# Altium PCB Nano.PcbDoc
Units mm, origin at the board's own origin, x right, y up, seen from the top; angles counter-clockwise.
Board outline 44 x 18.01 mm, 4 copper layers (Top Layer, GND, POWER, Bottom Layer), stack 0.746 mm thick; 37 components, 43 nets, 179 pads, 69 vias.
Unrouted connection lines stored in the file: 6.
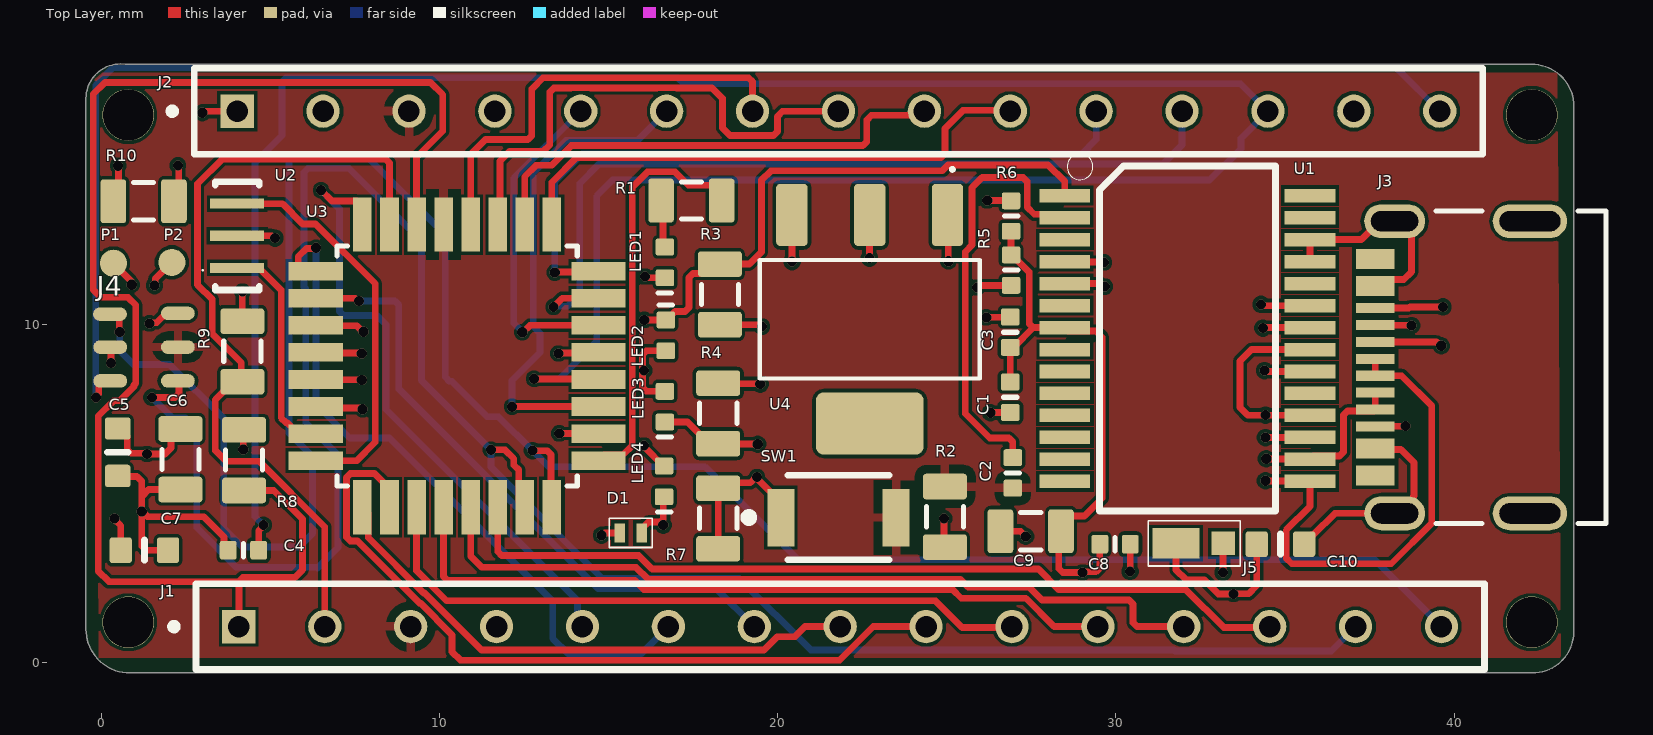
[diagram p0: Top Layer view]
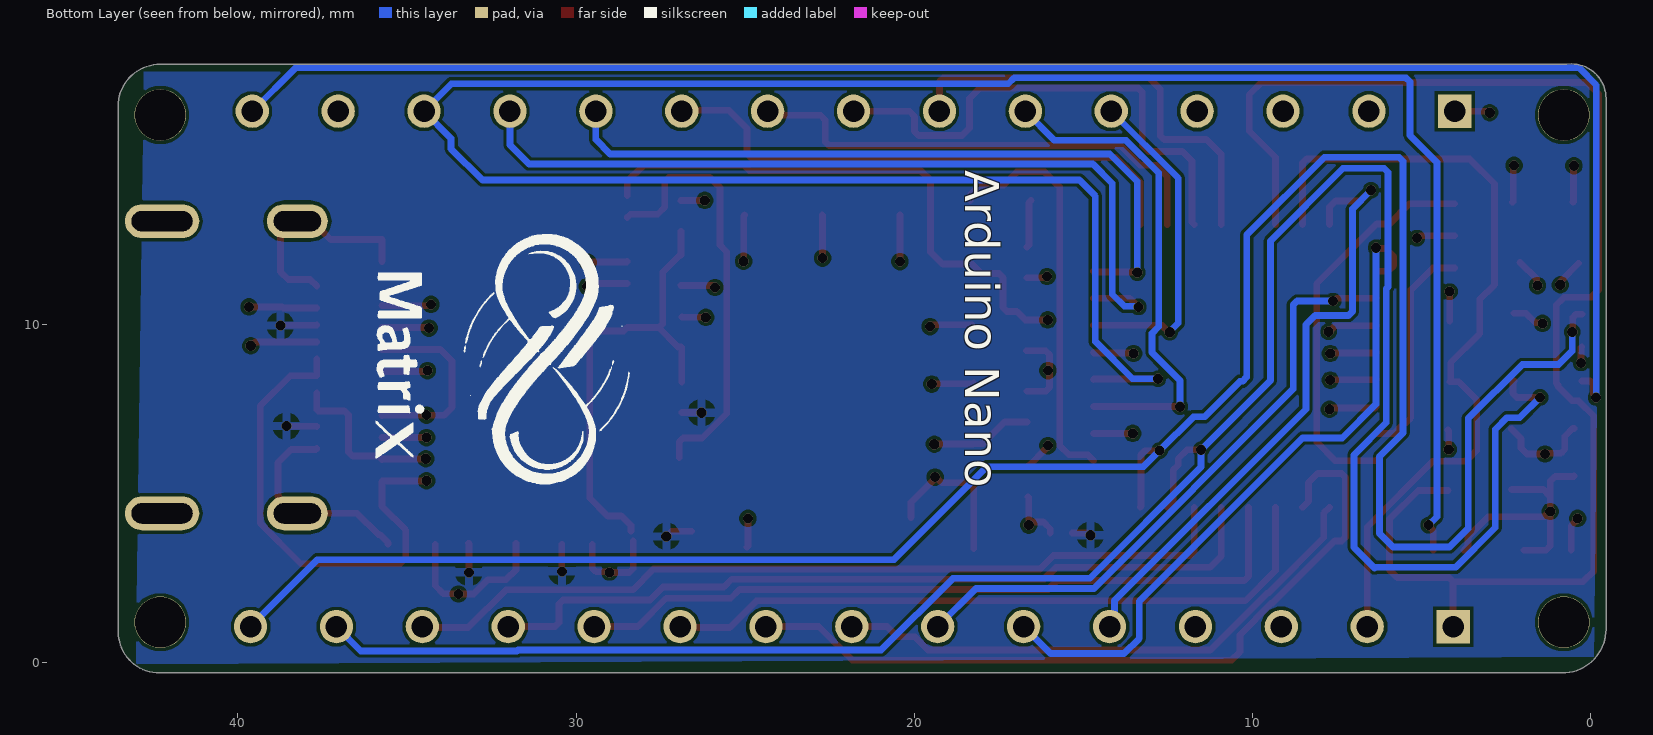
[diagram p1: Bottom Layer view, seen from below]
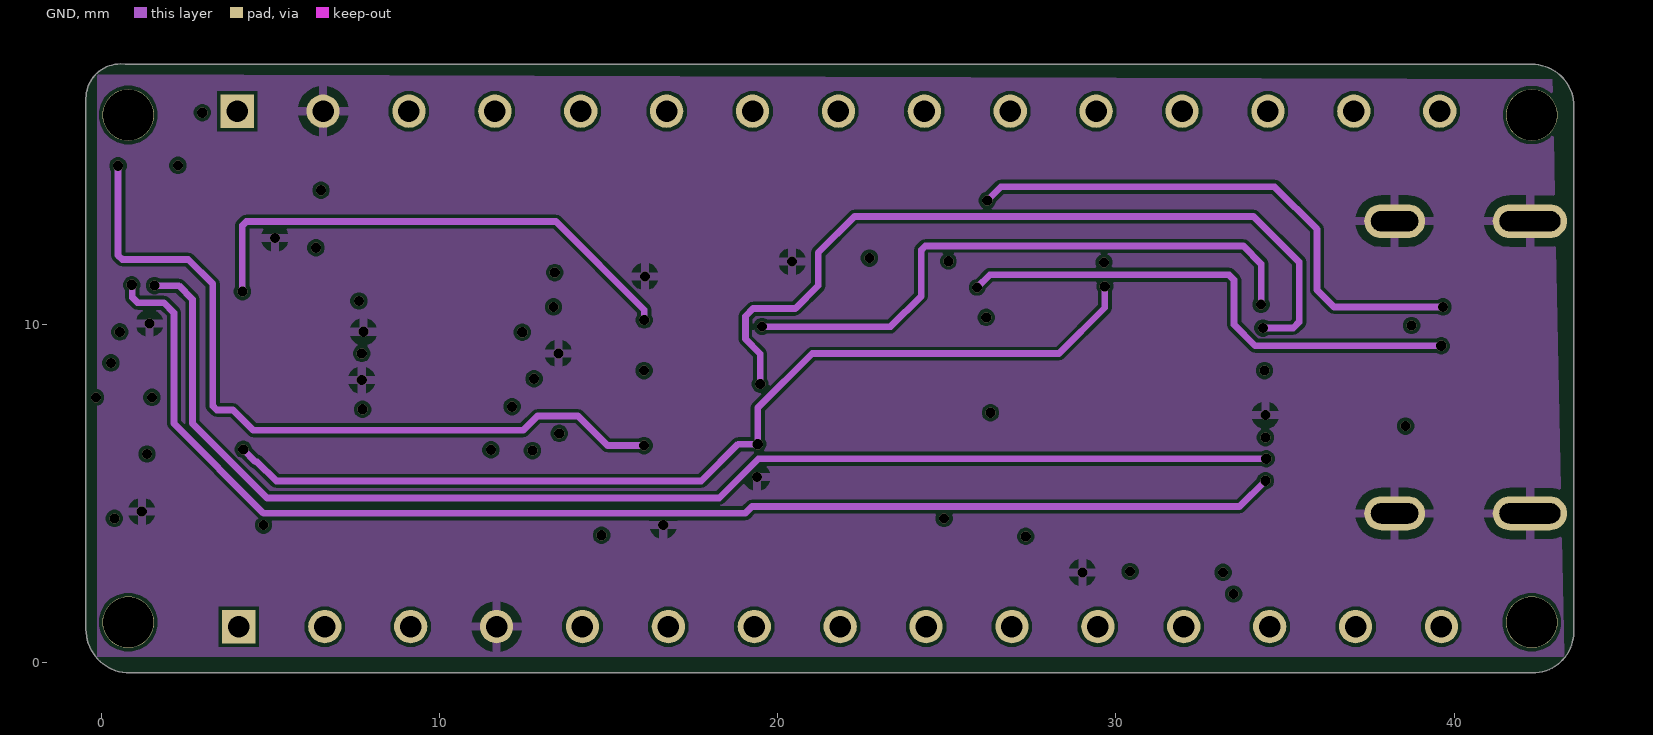
[diagram p2: GND]
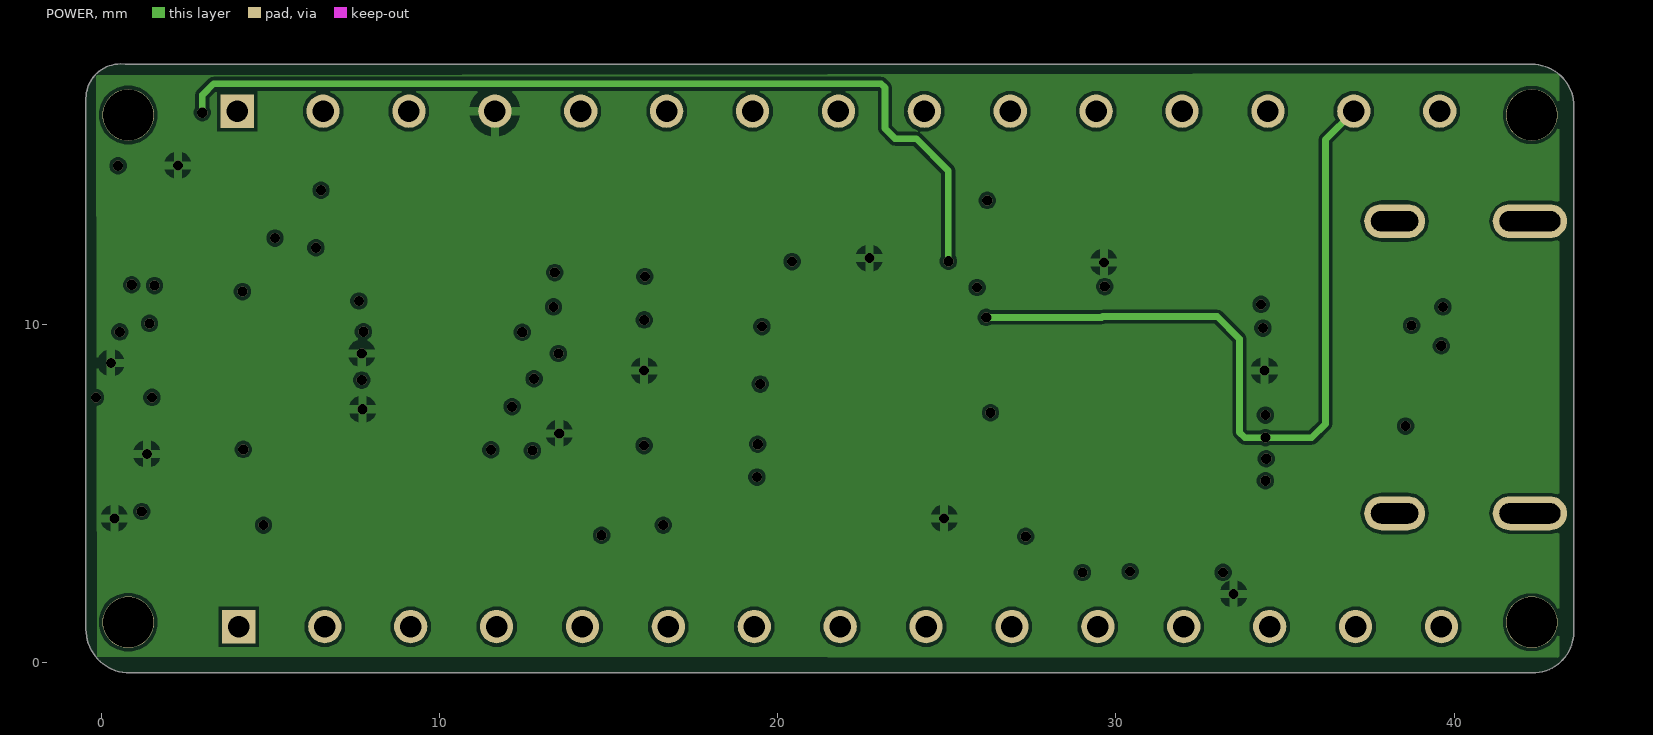
[diagram p3: POWER]
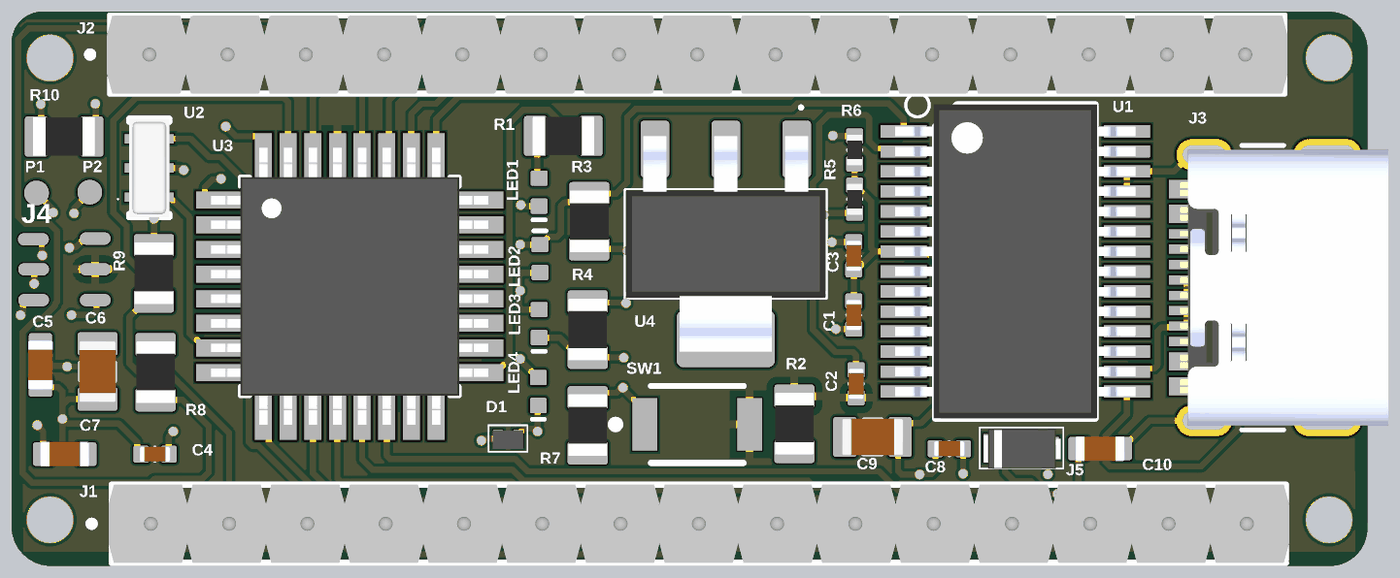
[diagram p4: 3D render of the assembled board from above, using the file's embedded part models]

## Layer stack, top to bottom
Top Solder: solder mask 0.0102, Solder Resist, Dk 3.5
Top Layer: signal copper 0.035
Dielectric 2: prepreg 0.0711, PP-006, Dk 4.1
Dielectric 4: prepreg 0.0711, PP-006, Dk 4.1
GND: signal copper 0.0356
Dielectric 1: dielectric 0.32, FR-4, Dk 4.8
POWER: signal copper 0.0356
Dielectric 5: prepreg 0.0711, PP-006, Dk 4.1
Dielectric 3: prepreg 0.0711, PP-006, Dk 4.1
Bottom Layer: signal copper 0.035
Bottom Solder: solder mask 0.0102, Solder Resist, Dk 3.5

## Board outline
43.543,16.452 ccw(c42.295,16.448) 42.291,17.695 0.711,17.695 0.559,17.704 ccw(c0.559,16.688) -0.457,16.688 -0.457,0.991 ccw(c0.838,0.991) 0.838,-0.305 42.316,-0.305 ccw(c42.316,0.914) 43.536,0.914 43.543,1.575

## Design rules (kind name [scope] priority, off if disabled: settings)
Clearance [All] p1: gap=0.1 ignorepadtopadclearanceinfootprint=FALSE
MinimumSolderMaskSliver [All] p1: minsoldermaskwidth=0.05
PolygonConnect [All] p1: connectstyle=Relief reliefconductorwidth=0.254 reliefentries=4 polygonreliefangle="90 Angle" airgapwidth=0.254
RoutingVias [All] p1: holewidth=0.5 width=0.1 viastyle="Through Hole" minholewidth=0.5 minwidth=0.1 maxholewidth=0.5 maxwidth=0.2
SMDNeckDown [All] p1: percent=75.000
SilkToSilkClearance [All] p1: silktosilkclearance=0.05
SilkToSolderMaskClearance [IsPad] p1: minsilkscreentomaskgap=0.05 clearancetoexposedcopper=TRUE
SolderMaskExpansion [All] p1: expansion=0.05 istentingtop=FALSE
SupplyNets "Schematic Supply Nets_4" [InNet('3V3')] p1: voltage=0.000
SupplyNets "Schematic Supply Nets_3" [InNet('+5v')] p2: voltage=0.000
SupplyNets "Schematic Supply Nets_2" [InNet('VUSB')] p3: voltage=0.000
SupplyNets "Schematic Supply Nets_1" [InNet('VIN')] p4: voltage=0.000
SupplyNets "Schematic Supply Nets" [InNet('GND')] p5: voltage=0.000
Width [All] p1: maxlimit=0.3 minlimit=0.05 preferedwidth=0.2
27 further rules are at their usual default settings.

## Components (designator, comment, footprint, x,y, rotation, side; value= is the part's Value field where it differs from the comment)
C1 "Capacitor 100nF +/-20% 50V 0402" CAPC0402(1005)60_L 26.873,7.849 r90 top value=100nF
C2 "Capacitor 100nF +/-20% 50V 0402" CAPC0402(1005)60_L 26.949,5.613 r90 top value=100nF
C3 "Capacitor 100nF +/-20% 50V 0402" CAPC0402(1005)60_L 26.873,9.772 r270 top value=100nF
C4 "Capacitor 100nF +/-20% 50V 0402" CAPC0402(1005)60_L 4.198,3.327 r180 top value=100nF
C5 "Capacitor 1µF +/-40% 50V 0603" CAPC0603(1608)100_L 0.483,6.223 r270 top value=1µF
C6 "Capacitor 4.7µF +/-40% 25V 0805" CAPC0805(2012)145_L 2.337,6.009 r270 top value=4.7µF
C7 "Capacitor 1µF +/-40% 50V 0603" CAPC0603(1608)100_L 1.27,3.327 r0 top value=1µF
C8 "Capacitor 100nF +/-20% 50V 0402" CAPC0402(1005)60_L 29.972,3.505 r180 top value=100nF
C9 "Capacitor 4.7µF +/-40% 25V 0805" CAPC0805(2012)145_L 27.483,3.886 r0 top value=4.7µF
C10 "Capacitor 1µF +/-40% 50V 0603" CAPC0603(1608)100_L 34.863,3.505 r0 top value=1µF
D1 "AQ3045-01ETG" AQ3045-01ETG 14.813,3.175 r0 top
J1 "HEADER" HEADER 2.286,-0.711 r0 top
J2 "HEADER" HEADER 2.235,14.529 r0 top
J3 "217179-0001" 2171790001 44.9,3.275 r90 top
J4 "ICSP" ICSP -0.324,7.944 r0 top
J5 "SS1P3L" SS1P3L 32.175,2.531 r0 top
LED1 "QBLP595-Y" QTB-QBLP595_V 16.662,11.836 r90 top
LED2 "QBLP595-R" QTB-QBLP595_V 16.688,9.68 r270 top
LED3 "QBLP595-IG" QTB-QBLP595_V 16.662,7.569 r90 top
LED4 "QBLP595-IG" QTB-QBLP595_V 16.637,5.362 r90 top
P1 "D-" "TEST POINT" -0.127,11.303 r0 top
P2 "D+" "TEST POINT" 1.6,11.328 r0 top
R1 "1KR5J" RESC0805(2012)_L 17.45,13.665 r0 top value=1k
R2 "1KR5J" RESC0805(2012)_L 24.943,4.317 r90 top value=1k
R3 "1KR5J" RESC0805(2012)_L 18.288,10.886 r270 top value=1k
R4 "1KR5J" RESC0805(2012)_L 18.237,7.377 r90 top value=1k
R5 "Resistor 5K6  +/-5 % 0402 63 mW" RESC0402(1005)_L 26.899,11.608 r90 top value=5.6k
R6 "Resistor 5K6  +/-5 % 0402 63 mW" RESC0402(1005)_L 26.899,13.208 r270 top value=5.6k
R7 "1KR5J" RESC0805(2012)_L 18.237,4.267 r90 top value=1k
R8 "1KR5J" RESC0805(2012)_L 4.216,5.994 r90 top value=1k
R9 "1KR5J" RESC0805(2012)_L 4.166,9.206 r90 top value=1k
R10 "1KR5J" RESC0805(2012)_L 1.243,13.645 r180 top value=1k
SW1 "B3U-1000P" OMRON-B3U-1000_V 21.791,4.293 r0 top
U1 "FT232-RL" FT232-RL 28.049,3.998 r270 top
U2 "CSTCE16M0V53-R0" MURA-CSTCE_V-3_V 4.013,12.624 r90 top
U3 "ATMEGA-328P" ATMEGA-328P 5.268,3.525 r0 top
U4 "LM1117IMPX-5.0" LM1117IMPX-5.0 19.218,14.41 r270 top

## Footprints (in the part's own frame and the unit in brackets; to place one, negate y for a bottom-side part, rotate by r counter-clockwise, add the part's x,y. Pads: shape width x height; smd on the part's side, far side on the other; paste and mask are expansions set on the pad)
2171790001 [mm]
  rect 0.298x1.15 smd mask+0.064: 1(3.711,7.235) 2(6.711,7.235) 3(4.211,7.235) 4(4.711,7.235) 5(5.211,7.235) 6(5.711,7.235) 7(6.211,7.235) 8(7.211,7.235)
  oval 1x1.8 hole 0.6 slot 1.4 at 90 deg mask+0.064: 9(9.781,6.66) 10(1.141,6.66)
  oval 1x2.2 hole 0.6 slot 1.8 at 90 deg mask+0.064: 11(9.781,2.66) 12(1.141,2.66)
  rect 0.59x1.15 smd mask+0.064: 13(3.061,7.235) 14(7.861,7.235) A1B12(2.261,7.235) B1A12(8.661,7.235)
  silkscreen extent 0.84,0.41 10.08,5.44, body extent 0.99,0.69 9.93,7.44, height 3.24
AQ3045-01ETG [mm]
  rect 0.3x0.55 smd mask+0.051: 0(0.513,0.66) 1(1.163,0.66)
  silkscreen extent 0.2,0.23 1.47,1.09, body extent 0.34,0.31 1.34,0.91, height 0.55
ATMEGA-328P [mm]
  rect 1.6x0.55 smd paste+0 mask+0.076: 1(1.07,8.05) 2(1.07,7.25) 3(1.07,6.45) 4(1.07,5.65) 5(1.07,4.85) 6(1.07,4.05) 7(1.07,3.25) 8(1.07,2.45) 17(9.43,2.45) 18(9.43,3.25) 19(9.43,4.05) 20(9.43,4.85) 21(9.43,5.65) 22(9.43,6.45) 23(9.43,7.25) 24(9.43,8.05)
  rect 0.55x1.6 smd paste+0 mask+0.076: 9(2.45,1.07) 10(3.25,1.07) 11(4.05,1.07) 12(4.85,1.07) 13(5.65,1.07) 14(6.45,1.07) 15(7.25,1.07) 16(8.05,1.07) 25(8.05,9.43) 26(7.25,9.43) 27(6.45,9.43) 28(5.65,9.43) 29(4.85,9.43) 30(4.05,9.43) 31(3.25,9.43) 32(2.45,9.43)
  silkscreen extent 1.7,1.7 8.8,8.8, body extent 0.75,0.75 9.75,9.75, height 1.2
CAPC0402(1005)60_L [mm] "Chip Capacitor, Body 1.0x0.5mm, Height 0.6mm, IPC High Density"
  rrect25% 0.5x0.55 smd: 1(-0.45,0) 2(0.45,0)
  silkscreen extent 0,-0.2 0,0.2, body extent -0.5,-0.25 0.5,0.25, height 0.6
CAPC0603(1608)100_L [mm] "Chip Capacitor, Body 1.6x0.8mm, Height 1.0mm, IPC High Density"
  rrect25% 0.66x0.76 smd: 1(-0.7,0) 2(0.7,0)
  silkscreen extent 0,-0.3 0,0.3, body extent -0.8,-0.4 0.8,0.4, height 0.95
CAPC0805(2012)145_L [mm] "Chip Capacitor, Body 2.0x1.2mm, Height 1.45mm, IPC High Density"
  rrect25% 0.76x1.3 smd: 1(-0.9,0) 2(0.89,0)
  silkscreen extent -0.3,-0.55 0.3,0.55, body extent -1,-0.6 1,0.6, height 1.45
FT232-RL [mm]
  rect 0.4x1.5 smd paste+0 mask+0.076: 1(-9.813,0.439) 2(-9.163,0.439) 3(-8.513,0.439) 4(-7.863,0.439) 5(-7.213,0.439) 6(-6.563,0.439) 7(-5.913,0.439) 8(-5.263,0.439) 9(-4.613,0.439) 10(-3.963,0.439) 11(-3.313,0.439) 12(-2.663,0.439) 13(-2.013,0.439) 14(-1.363,0.439) 15(-1.363,7.689) 16(-2.013,7.689) 17(-2.663,7.689) 18(-3.313,7.689) 19(-3.963,7.689) 20(-4.613,7.689) 21(-5.263,7.689) 22(-5.913,7.689) 23(-6.563,7.689) 24(-7.213,7.689) 25(-7.863,7.689) 26(-8.513,7.689) 27(-9.163,7.689) 28(-9.813,7.689)
  silkscreen extent -11.05,0.51 -0.49,6.66, body extent -10.69,0.16 -0.49,7.96, height 2
HEADER [mm]
  rect 0.985x0.985 hole 0.635: 1(1.778,1.778)
  round 0.985 hole 0.635: 2(4.318,1.778) 3(6.858,1.778) 4(9.398,1.778) 5(11.938,1.778) 6(14.478,1.778) 7(17.018,1.778) 8(19.558,1.778) 9(22.098,1.778) 10(24.638,1.778) 11(27.178,1.778) 12(29.718,1.778) 13(32.258,1.778) 14(34.798,1.778) 15(37.338,1.778)
  silkscreen extent -0.24,0.51 38.61,3.05, body extent 0.41,0.51 38.71,3.05, height 8.28
ICSP [mm]
  oval 1x0.4 smd: 1(0.578,2.362) 2(0.584,1.388) 3(0.584,0.388) 4(2.584,0.388) 5(2.584,1.388) 6(2.584,2.388)
LM1117IMPX-5.0 [mm]
  rrect25% 1.84x0.93 smd: 1(1.17,5.8) 2(1.17,3.5) 3(1.17,1.2)
  rrect25% 1.84x3.19 smd: 4(7.34,3.5)
  silkscreen extent -0.23,0.25 6,6.75, body extent 0.76,0.25 7.75,6.75, height 1.8
MURA-CSTCE_V-3_V [mm] "SMD, 3-Leads, Body 3.2x1.3mm, Pitch 0.95mm"
  rect 0.3x1.6 smd: 1(-0.95,0) 2(0,0) 3(0.95,0)
  silkscreen extent -1.6,-0.65 1.6,1.03, body extent -1.6,-0.65 1.6,0.65, height 1.02
OMRON-B3U-1000_V [mm] "SMD, 2-Leads, Body 3x2.5mm"
  rect 0.8x1.7 smd: 1(-1.7,0) 2(1.7,0)
  silkscreen extent -2.77,-1.25 1.5,1.25, body extent -1.5,-1.25 1.5,1.25, height 1.75
QTB-QBLP595_V [mm] "SMD, 2-Leads, Body 1x0.5mm"
  rrect25% 0.5x0.55 smd: 1(-0.455,0) 2(0.455,0)
  silkscreen extent -0.9,-0.2 -0.9,0.2, body extent -0.5,-0.25 0.5,0.25, height 0.5
RESC0402(1005)_L [mm] "Chip Resistor, Body 1.0x0.5mm, IPC High Density"
  rrect25% 0.5x0.55 smd: 1(-0.45,0) 2(0.45,0)
  silkscreen extent 0,-0.2 0,0.2, body extent -0.5,-0.25 0.5,0.25, height 0.3
RESC0805(2012)_L [mm] "Chip Resistor, Body 2.0x1.3mm, IPC High Density"
  rrect25% 0.76x1.3 smd: 1(-0.9,0) 2(0.89,0)
  silkscreen extent -0.3,-0.55 0.3,0.55, body extent -1,-0.62 1,0.63, height 0.6
SS1P3L [mm]
  rect 0.7x0.7 smd mask+0.05: A(1,1)
  rect 1.4x0.9 smd paste+0 mask+0.05: K(-0.4,1)
  silkscreen extent -1.22,0.33 1.5,1.66, body extent -1.1,0.32 1.4,1.62, height 0.73
"TEST POINT" [mm]
  round 0.8 smd: 1(0.483,0.508)

## Part data
C1 C2 C3 C4 C8: library part CMP-001-00067-3, "Chip Capacitor, 100nF +/-20%, 50V, 0402, Thickness 0.6 mm", Case/Package=0402, Max Operating Temperature=85°C, Min Operating Temperature=-55°C, Tolerance=10%, Voltage Rating=50V, Mounting Technology=SMT, Pins=2
C5 C7 C10: library part CMP-001-00078-4, "Chip Capacitor, 1µF +/-40%, 50V, 0603, Thickness 1 mm", Case/Package=0603, Max Operating Temperature=85°C, Min Operating Temperature=-55°C, Tolerance=10%, Voltage Rating=50V, Mounting Technology=SMT, Pins=2
C6 C9: library part CMP-001-00080-4, "Chip Capacitor, 4.7µF +/-40%, 25V, 0805, Thickness 1.45 mm", Case/Package=0805, Max Operating Temperature=85°C, Min Operating Temperature=-55°C, Tolerance=20%, Voltage Rating=25V, Mounting Technology=SMT, Pins=2
D1: "Bi 30Kv 5V 0.35Pf Automotve Tvs Sod882/ T&r Rohs Compliant: Yes"
J1 J2: "Header Pins placements"
J3: library part "USB - C", "USB Connector, USB Type C, USB 2.0, Receptacle, 16 Ways, Surface Mount, Through Hole Mount"
J5: "Diode Schottky 30 V 1.5A Surface Mount DO-220AA (SMP)", Package="MicroSMP Vishay General Semiconductor - Diodes Division", Check_prices=https://www.snapeda.com/parts/SS1P3L/Vishay/view-part/?ref=eda, MF="Vishay Semiconductor", MP=SS1P3L, SnapEDA_Link=https://www.snapeda.com/parts/SS1P3L/Vishay/view-part/?ref=snap
LED1: library part CMP-007-00043-3, "Chip LED 0402, Yellow, 0.02 A, 3.1 to 3.7 V, -40 to 80 degC, 2-Pin SMD, RoHS, Tape and Reel", Case/Package=0402, Colour=Yellow, Mounting Technology=SMT, Pins=2, RoHS Compliant=Yes
LED2: library part CMP-007-00040-3, "Chip LED 0402, Red, 0.02 A, 2.0 to 2.5 V, -40 to 80 degC, 2-Pin SMD, RoHS, Tape and Reel", Case/Package=0402, Colour=Red, Mounting Technology=SMT, Pins=2, RoHS Compliant=Yes
LED3 LED4: library part CMP-007-00041-3, "Chip LED 0402, Green, 0.02 A, 3.1 to 3.7 V, -40 to 80 degC, 2-Pin SMD, RoHS, Tape and Reel", Case/Package=0402, Colour=Green, Mounting Technology=SMT, Pins=2, RoHS Compliant=Yes
P1 P2: library part "TEST POINT"
R1 R2 R3 R4 R7 R8 R9 R10: library part CMP-009-00076-2, "1K 0.125W 5% 0805 (2012 Metric)  SMD", Case/Package=0805, Power=125mW, Tolerance=5%, Mounting Technology=SMT, Pins=2
R5 R6: library part CMP-009-00136-3, "Chip Resistor, 5,6 kOhms, +/-5 %, 63 mW, -55 to 155 degC, 0402", Case/Package=0402, Max Operating Temperature=155°C, Min Operating Temperature=-55°C, Power=63mW, Tolerance=5%, Pins=2
SW1: library part CMP-011-00000-2, "Tactile Switch, SPST-NO, 0.05 A, 12 V, -25 to 70 degC, 2-Pin SMD, RoHS, Tape and Reel", Case/Package=B3U-1000, Contact Current Rating=50mA, IP Rating=IP40, Manufacturer="Omron Electronic Components", Max Contact Resistance=100mohm, Max Operating Temperature=70°C, Max Voltage Rating (DC)=12V, Min Operating Temperature=-25°C, Operating Force=153gf, Package Description="2-Pin Surface Mount Device, Body 3 x 2.5 mm", Package Quantity=3500, Resistance=0.1Ohm, Contact Material=Silver, Current Rating=50mA, Datasheet URL=http://www.omron.com/ecb/products/pdf/en-b3u.pdf, Datasheet Version=Jan-15, Manufacturer URL=http://www.omron.com/, Max Current Rating=50mA, Mounting Technology=SM, Package Reference=B3U-1000, Packaging=TapeandReel, RoHS Compliant=True, Throw Configuration=SPST, Voltage Rating=12V, Voltage Rating (DC)=12V
U1: "USB Bridge, USB to UART USB 2.0 UART Interface 28-SSOP"
U2: library part CMP-003-00023-3, "Ceramic Resonator, 16 MHz, +/- 0.5%, 15 pF, -20 to 80 degC, 3-Pin SMD, RoHS, Tape and Reel", Case/Package=CSMD, Frequency=16MHz, Frequency Tolerance=0.5%, Load Capacitance=15pF, Manufacturer=Murata, Max Operating Temperature=80°C, Min Operating Temperature=-20°C, Package Quantity=3000, Package Reference=CSTCE_V-3, Datasheet URL=http://www.murata.com/products/catalog/pdf/p16e.pdf, Datasheet Version="Rev. P16E, 12/2015", Impedance=40Ohm, Manufacturer URL=http://www.murata.com/, Packaging=TapeandReel, Pins=3, RoHS Compliant=True, Self Resonant Frequency=16MHz, Tolerance=0.5%
U3: "AVR AVR® ATmega, Functional Safety (FuSa) Microcontroller IC 8-Bit 20MHz 32KB (16K x 16) FLASH 32-TQFP (7x7)"
U4: library part LM111IMPX-5.0, "Linear Voltage Regulator IC Positive Fixed 1 Output 800mA SOT-223-4"

## Free pads (board coordinates)
  round 1.524 hole 1.5 paste+0 mask+0: 1(0.793,16.195) 2(42.293,16.195) 3(42.293,1.195) 4(0.793,1.195)

## Via types
v1: diameter 0.3, hole 0.3, Top Layer to Bottom Layer, tented top, 68 vias
v2: diameter 0.3, hole 0.3, Top Layer to Bottom Layer, tented both sides, 1 vias

## Nets (pads, with @x,y where several pads share a name; then routed paths per layer and width w, separated by ;. In a path a pad name is that pad's centre, name@x,y a point inside that pad or via, vN(x,y) a via of type N, cw(c..) or ccw(c..) an arc to the next point about the centre after c; other vN are vias at no path point)
3V3: C3.1 J2.14 U1.17 | length 24.9
  Top Layer w0.2: v1(26.162,10.211) 26.168,10.216 26.868,10.216 C3.1 ; v1(34.417,6.655) 34.42,6.658 35.735,6.658 U1.17
  POWER w0.2: v1(26.162,10.211) 29.579,10.211 29.605,10.236 32.995,10.236 33.655,9.576 33.655,6.807 33.807,6.655 v1(34.417,6.655) 35.789,6.655 36.195,7.061 36.195,15.469 J2.14
+5v: C5.1 C6.1 C7.1 C10.1 J2.4 J4.2 J5.K LED2.2 LED3.2 R2.1 R10.1 U1.4 U1.20 U3.4 U3.6 U3.18 U4.2 | length 21.3
  Top Layer w0.2: J4.2 0.279,9.312 v1(0.279,8.865) ; v1(0.381,4.267) 0.381,4.24 0.57,4.051 C7.1 ; C5.1 0.532,6.923 0.763,6.693 0.763,6.308 0.88,6.191 1.327,6.191 v1(1.346,6.172) 1.88,6.172 2.053,6.346 2.053,6.629 2.333,6.909 C6.1 ; v1(2.261,14.707) 2.286,14.681 2.286,13.64 R10.1@2.311,13.614 ; U3.6 6.379,7.534 7.681,7.534 v2(7.722,7.493) ; U3.4 6.353,9.16 7.681,9.16 v1(7.696,9.144) ; v1(13.538,6.782) 13.542,6.778 14.695,6.778 U3.18 ; v1@15.998,8.636 15.998,9.107 16.115,9.225 LED2.2 ; v1(16.048,8.636) 16.048,8.609 15.998,8.559 15.998,8.141 16.115,8.024 LED3.2 ; v1(22.708,11.963) 22.708,13.23 U4.2 ; v1(24.917,4.267) 24.917,3.442 R2.1 ; U1.4 28.5,11.848 29.63,11.848 v1(29.642,11.836) ; J5.K 31.775,2.743 32.064,2.454 32.608,2.454 33.027,2.035 33.474,2.035 v1(33.477,2.032) 33.486,2.04 33.927,2.04 34.163,2.276 C10.1 ; v1(34.392,8.636) 34.419,8.636 34.444,8.611 U1.20
A0: J2.12 U3.23 | length 24.9
  Top Layer w0.2: v1(13.368,10.52) 13.623,10.775 U3.23
  Bottom Layer w0.2: v1(13.368,10.52) 13.387,10.539 13.787,10.539 14.143,10.895 14.143,14.17 14.718,14.745 31.393,14.745 31.953,15.306 J2.12
A1: J2.11 U3.24 | length 21.4
  Top Layer w0.2: v1(13.405,11.536) 13.424,11.556 14.678,11.556 U3.24
  Bottom Layer w0.2: v1(13.405,11.536) 13.405,14.233 14.218,15.045 28.993,15.045 29.413,15.466 J2.11
A2: J2.10 U3.25 | length 16.1
  Top Layer w0.2: U3.25 13.318,14.207 14.046,14.935 24.826,14.935 24.943,15.052 24.943,15.799 25.476,16.332 26.848,16.332 J2.10
A3: J2.9 U3.26 | length 14.4
  Top Layer w0.2: U3.26 12.518,14.372 12.852,14.707 13.31,14.707 13.894,15.291 22.514,15.291 22.631,15.408 22.631,16.053 22.766,16.188 24.214,16.188 J2.9
A4: J2.8 U3.27 | length 15.4
  Top Layer w0.2: U3.27 11.786,13.023 11.786,14.834 12.065,15.113 13.056,15.113 13.259,15.316 13.259,16.88 13.376,16.997 13.884,16.997 13.886,16.999 14.46,16.999 14.462,16.997 16.424,16.997 16.426,16.999 17,16.999 17.002,16.997 18.055,16.997 18.364,16.688 18.364,15.814 18.588,15.591 19.873,15.591 19.99,15.708 19.99,16.154 20.142,16.307 J2.8
A5: J2.7 U3.28 | length 13.1
  Top Layer w0.2: U3.28 10.918,15.033 11.354,15.469 12.608,15.469 12.725,15.586 12.725,16.967 13.056,17.297 13.76,17.297 13.762,17.299 14.584,17.299 14.586,17.297 16.3,17.297 16.302,17.299 17.124,17.299 17.126,17.297 19.136,17.297 19.253,17.18 J2.7
A6: J2.6 U3.19 | length 14.6
  Top Layer w0.2: v1(12.143,7.57) 12.145,7.573 14.695,7.573 U3.19
  Bottom Layer w0.2: v1(12.143,7.57) 12.143,8.345 12.968,9.17 12.968,9.74 12.768,9.94 12.768,14.477 13.736,15.445 15.852,15.445 J2.6
A7: J2.5 U3.22 | length 9.8
  Top Layer w0.2: v1(12.443,9.77) 12.47,9.77 12.675,9.975 U3.22
  Bottom Layer w0.2: v1(12.443,9.77) 12.443,9.797 12.193,10.047 12.193,14.326 J2.5
AREF: C4.1 J2.13 U3.20 | length 73.5
  Top Layer w0.2: C4.1 4.648,3.902 4.791,4.045 v1(4.791,4.066) ; v1(12.793,8.395) 12.803,8.385 14.688,8.385 U3.20
  Bottom Layer w0.2: v1(4.791,4.066) 4.543,4.315 4.543,14.795 5.343,15.595 5.343,17.178 5.46,17.295 17.043,17.295 17.218,17.12 33.68,17.12 J2.13 33.693,15.506 33.693,15.195 32.768,14.27 15.118,14.27 14.643,13.795 14.643,9.495 13.543,8.395 v1(12.793,8.395)
D0/TX: J1.1 R8.1 U3.30 | length 41.7
  Top Layer w0.2: J1.1 4.064,2.403 ; R8.1 5.094,5.094 5.943,4.246 5.943,2.745 5.718,2.52 4.181,2.52 4.064,2.403 ; U3.30 9.318,14.945 10.093,15.72 10.093,16.795 9.731,17.157 0.105,17.157 -0.244,16.808 -0.244,11.037 -0.011,10.804 0.784,10.804 1.018,10.57 1.018,8.27 0.961,8.213 0.961,8.166 0.538,7.743 0.358,7.743 -0.097,7.288 -0.097,2.71 0.218,2.395 4.056,2.395 4.064,2.403
D1/RX: J1.2 R9.1 U3.31 | length 23.9
  Top Layer w0.2: J1.2 6.604,4.009 4.655,5.958 3.686,5.958 3.366,6.277 3.366,7.777 3.896,8.306 R9.1 4.136,8.336 4.136,8.869 3.28,9.725 3.28,10.738 2.843,11.175 2.843,12.007 2.843,13.14 2.843,14.162 3.576,14.895 8.401,14.895 8.518,14.778 U3.31
D2: J1.5 U3.32 | length 18.6
  Top Layer w0.2: v1(6.493,13.97) 6.5,13.97 6.814,13.655 7.543,13.655 7.718,13.48 U3.32
  Bottom Layer w0.2: v1(6.493,13.97) 7.043,13.42 7.043,10.387 7.16,10.27 8.143,10.27 8.418,9.995 8.418,7.495 14.074,1.839 14.074,1.217 J1.5
D3: J1.6 U3.1 | length 20.6
  Top Layer w0.2: U3.1 5.993,11.575 5.818,11.75 5.818,12.003 6.066,12.251 6.324,12.251 v1(6.343,12.27)
  Bottom Layer w0.2: v1(6.343,12.27) 6.343,7.645 7.343,6.645 8.518,6.645 13.343,1.82 13.343,0.72 13.793,0.27 15.967,0.27 J1.6
D4: J1.7 U3.2 | length 18.4
  Top Layer w0.2: U3.2 7.505,10.775 7.586,10.694 v1(7.613,10.694)
  Bottom Layer w0.2: v1(7.613,10.694) 8.676,10.694 8.793,10.577 8.793,8.087 14.685,2.195 18.176,2.195 J1.7
D5: J1.8 U3.9 | length 16.6
  Top Layer w0.2: U3.9 7.893,4.42 7.893,3.695 9.529,2.059 9.555,2.059 11.24,0.374 19.591,0.374 19.987,0.77 20.506,0.77 20.803,1.067 J1.8
D6: J1.9 U3.10 | length 23.2
  Top Layer w0.2: U3.10 8.343,4.77 8.343,5.328 8.076,5.595 7.36,5.595 7.243,5.478 7.243,3.712 7.36,3.595 7.569,3.595 9.404,1.759 9.431,1.759 10.368,0.822 10.368,0.32 10.614,0.074 21.831,0.074 22.823,1.067 J1.9
D7: J1.10 U3.11 | length 20.2
  Top Layer w0.2: U3.11 9.318,2.721 10.21,1.829 24.663,1.829 25.451,1.041 26.899,1.041 J1.10
D8: J1.11 U3.12 | length 22
  Top Layer w0.2: U3.12 10.118,2.547 10.235,2.43 15.775,2.43 16.037,2.167 25.163,2.167 25.425,1.905 27.333,1.905 28.172,1.067 J1.11
D9: J1.12 U3.13 | length 23.7
  Top Layer w0.2: U3.13 10.918,3.154 11.251,2.821 15.809,2.821 16.16,2.469 25.395,2.469 25.629,2.235 27.427,2.235 27.808,1.854 30.388,1.854 30.505,1.737 30.505,1.184 30.623,1.067 J1.12
D10: J1.13 U3.14 | length 25.1
  Top Layer w0.2: U3.14 11.718,3.284 11.835,3.167 15.887,3.167 16.285,2.769 27.704,2.769 28.318,2.154 32.076,2.154 33.189,1.041 34.519,1.041 J1.13
D11/MOSI: J1.14 J4.4 U3.15 | length 64.7
  Top Layer w0.2: v1(1.493,7.845) 2.176,7.845 2.293,7.962 2.293,8.299 J4.4 ; v1(11.518,6.295) 11.931,6.295 12.193,6.033 12.193,5.845 12.343,5.695 12.343,4.77 U3.15
  Bottom Layer w0.2: v1(1.493,7.845) 2.093,7.245 2.468,7.245 2.818,6.895 2.818,3.995 3.993,2.82 6.368,2.82 6.385,2.803 6.993,3.411 6.993,6.145 6.043,7.095 6.043,11.058 5.993,11.108 5.993,14.503 6.11,14.62 7.318,14.62 9.468,12.47 9.468,8.345 v1(11.518,6.295) 11.518,5.786 14.809,2.495 18.855,2.495 20.976,0.374 31.717,0.374 31.744,0.347 36.365,0.347 J1.14
D12/MISO: J1.15 J4.1 U3.16 | length 67.3
  Top Layer w0.2: J4.1 0.431,10.306 0.524,10.213 0.524,9.8 v1(0.543,9.781) ; v1(12.743,6.27) 13.176,6.27 13.293,6.153 13.293,4.62 U3.16
  Bottom Layer w0.2: v1(0.543,9.781) 0.543,9.22 0.943,8.82 2.018,8.82 3.618,7.22 3.618,3.97 4.168,3.42 5.843,3.42 6.243,3.82 6.243,6.095 5.543,6.795 5.543,14.828 5.66,14.945 7.868,14.945 10.168,12.645 10.168,8.445 10.293,8.32 10.368,8.32 11.418,7.27 11.743,7.27 v1(12.743,6.27) 13.218,5.795 17.843,5.795 20.593,3.045 37.646,3.045 J1.15
"D13/ SCK": R1.2 U3.17 | length 12.1
  Top Layer w0.2: U3.17 14.873,6.15 15.431,6.15 15.698,6.417 15.698,14.07 16.143,14.515 16.957,14.515 17.352,14.12 18.06,14.12 18.34,13.84 R1.2
D13/SCK: J2.15 J4.3 | length 50.5
  Top Layer w0.2: v1(-0.162,7.844) -0.162,7.871 -0.078,7.956 -0.078,8.239 0.015,8.331 J4.3
  Bottom Layer w0.2: v1(-0.162,7.844) -0.169,7.851 -0.169,17.078 0.348,17.595 38.285,17.595 J2.15
GND: C1.2 C3.2 C4.2 C5.2 C6.2 C7.2 C8.2 C9.2 C10.2 D1.1 J1.4 J2.2 J3.9 J3.10 J3.11 J3.12 J3.13 J3.14 J4.6 LED1.1 LED4.1 R5.2 R6.2 R7.1 R7.2 SW1.1 U1.7 U1.18 U1.21 U1.25 U1.26 U2.2 U3.3 U3.5 U3.21 U4.3 | length 57.3
  Top Layer w0.2: C5.2 0.498,5.508 1.045,5.508 1.194,5.359 1.194,4.915 ; v1(1.422,10.033) 1.442,10.052 1.627,10.052 1.906,10.331 J4.6 ; C7.2 1.311,3.327 1.194,3.445 v1(1.194,4.47) ; C6.2 1.398,5.119 1.194,4.915 ; C4.2 3.624,3.451 3.624,3.716 3.023,4.318 1.361,4.318 1.209,4.47 v1(1.194,4.47) ; U2.2 5.034,12.624 5.104,12.554 v1(5.131,12.554) ; U3.5 6.347,8.366 7.687,8.366 v1(7.696,8.357) ; U3.3 6.347,9.966 7.54,9.966 7.72,9.786 v1(7.747,9.786) ; v1(13.513,9.144) 13.528,9.16 14.682,9.16 U3.21 ; D1.1 15.977,3.96 16.173,4.157 v1@16.521,4.157 ; v1(16.068,11.42) 16.095,11.42 16.134,11.381 LED1.1 ; v1(16.612,4.066) v1@16.521,4.157 ; LED4.1 16.616,4.885 16.616,4.251 v1@16.521,4.157 ; R7.1 R7.2 18.4,5.32 19.187,5.32 19.353,5.486 v1(19.38,5.486) 19.399,5.467 19.399,5.435 20.091,4.743 SW1.1 ; U4.3 20.418,11.866 v1(20.422,11.862) ; C1.2 C3.2 26.888,9.337 26.98,9.337 27.554,9.911 ; R5.2 R6.2 ; R5.2@26.924,12.058 27.432,11.549 27.432,10.033 27.554,9.911 ; C9.2@28.308,3.607 28.308,2.784 28.425,2.667 v1(29.007,2.667) 29.026,2.686 29.405,2.686 29.522,2.803 C8.2 ; C9.2 28.373,4.061 28.653,4.341 29.064,4.341 29.593,4.87 29.593,9.62 29.402,9.811 28.588,9.811 U1.7 27.554,9.911 ; C10.2 35.563,3.555 35.793,3.785 35.843,3.785 36.473,4.416 J3.10 38.424,4.416 38.793,4.785 38.793,4.915 38.811,4.933 38.811,5.918 38.423,6.306 37.694,6.306 J3.13 ; U1.18 35.733,7.315 34.423,7.315 v1(34.418,7.32) 33.893,7.32 33.668,7.545 33.668,8.92 34.008,9.261 U1.21 ; U1.25 U1.26 37.254,12.511 37.799,13.056 J3.9 38.365,13.056 38.735,12.686 38.735,11.557 38.509,11.331 37.86,11.331 J3.14 ; v1(1.194,4.47) 1.194,4.915
NetC2_2: C2.2 U1.2 | length 12.8
  Top Layer w0.2: C2.2 26.949,6.528 26.832,6.645 26.268,6.645 25.543,7.37 25.543,12.148 25.743,12.348 25.743,14.045 26.043,14.345 27.256,14.345 27.374,14.228 27.374,13.471 27.584,13.261 28.388,13.261 U1.2
NetJ3_3: J3.3 J3.4 P2.1 U1.16 | length 44
  Top Layer w0.2: v1(1.569,11.149) 1.589,11.168 1.589,11.342 P2.1 ; v1(34.442,6.03) 34.452,6.02 35.728,6.02 U1.16 35.838,6.111 36.611,6.111 36.728,6.228 36.728,7.325 36.846,7.442 37.622,7.442 J3.3 J3.4
  GND w0.2: v1(1.569,11.149) 2.289,11.149 2.693,10.745 2.693,7.07 4.893,4.87 18.269,4.87 19.429,6.03 v1(34.442,6.03)
NetJ3_5: J3.5 J3.6 P1.1 U1.15 | length 54.5
  Top Layer w0.2: P1.1 0.875,11.291 0.875,11.193 v1(0.894,11.174) ; v1(34.417,5.38) 34.427,5.37 35.728,5.37 U1.15 35.738,4.625 35.033,3.92 35.033,3.091 35.198,2.925 38.14,2.925 39.34,4.126 39.34,7.591 38.446,8.486 J3.5 J3.6
  GND w0.2: v1(0.894,11.174) 0.914,11.155 0.914,10.799 1.068,10.645 1.843,10.645 2.143,10.345 2.143,7.07 4.797,4.416 19.034,4.416 19.235,4.617 33.654,4.617 v1(34.417,5.38)
NetJ3_7: J3.7 R5.1 | length 18.6
  Top Layer w0.2: v1(25.893,11.095) 25.92,11.095 25.976,11.152 26.892,11.152 R5.1 ; J3.7 39.475,9.486 39.591,9.37 v1(39.618,9.37)
  GND w0.2: v1(25.893,11.095) 26.268,11.47 33.343,11.47 33.493,11.32 33.493,9.995 34.118,9.37 v1(39.618,9.37)
NetJ3_8: J3.8 R6.1 | length 18.9
  Top Layer w0.2: v1(26.193,13.67) 26.199,13.664 26.893,13.664 R6.1 ; J3.8 38.656,10.486 38.691,10.52 v1(39.668,10.52)
  GND w0.2: v1(26.193,13.67) 26.593,14.07 34.693,14.07 35.943,12.82 35.943,11.02 36.443,10.52 v1(39.668,10.52)
NetLED1_2: LED1.2 R1.1 | length 1.4
  Top Layer w0.2: R1.1 16.606,13.609 16.606,12.348 LED1.2
NetLED4_2: LED4.2 R10.2 | length 25
  Top Layer w0.2: v1(0.493,14.695) 0.507,14.681 0.507,13.629 R10.2@0.521,13.614 ; v1(16.048,6.42) 16.067,6.401 16.067,6.362 16.612,5.817 LED4.2
  GND w0.2: v1(0.493,14.695) 0.493,12.045 0.618,11.92 2.568,11.92 3.293,11.195 3.293,7.587 3.41,7.47 3.893,7.47 4.493,6.87 12.468,6.87 12.893,7.295 14.093,7.295 14.968,6.42 v1(16.048,6.42)
NetR3_2: R3.2 U1.23 | length 20.7
  Top Layer w0.2: R3.2 19.444,9.996 19.503,9.936 v1(19.53,9.936) ; v1(34.293,10.595) 34.32,10.595 34.362,10.553 35.73,10.553 U1.23
  GND w0.2: v1(19.53,9.936) 23.334,9.936 24.243,10.845 24.243,12.203 24.36,12.32 33.768,12.32 34.293,11.795 v1(34.293,10.595)
NetR4_2: R4.2 U1.22 | length 26.5
  Top Layer w0.2: R4.2 18.252,8.252 19.465,8.252 v1(19.48,8.236) ; v1(34.343,9.895) 34.358,9.911 U1.22
  GND w0.2: v1(19.48,8.236) 19.48,9.133 19.043,9.57 19.043,10.245 19.268,10.47 20.518,10.47 21.193,11.145 21.193,12.121 22.267,13.195 34.068,13.195 35.418,11.845 35.418,10.07 35.243,9.895 v1(34.343,9.895)
NetU2_1: U2.1 U3.7 | length 6.6
  Top Layer w0.2: U2.1@4.013,11.674 4.663,11.674 5.316,11.021 5.316,7.24 5.457,7.098 5.49,7.098 5.813,6.775 U3.7
NetU2_3: U2.3 U3.8 | length 11.7
  Top Layer w0.2: U2.3 5.349,13.574 5.949,12.974 6.33,12.974 8.097,11.207 8.097,6.522 7.544,5.969 6.344,5.969 U3.8
RESET: C2.1 J1.3 J2.3 J4.5 R2.2 SW1.2 U3.29
RX: LED2.1 R3.1 R9.2 U1.1 | length 32.8
  Top Layer w0.2: R9.2 4.167,10.097 v1(4.167,10.974) ; v1(16.052,10.136) LED2.1@16.687,10.135 ; LED2.1@16.713,10.135 16.964,10.386 17.256,10.386 17.373,10.503 17.373,11.388 17.49,11.506 18.008,11.506 R3.1 19.158,11.786 19.518,12.145 19.518,14.27 19.793,14.545 24.86,14.545 25.035,14.72 27.993,14.72 28.488,14.225 U1.1
  GND w0.2: v1(4.167,10.974) 4.167,12.928 4.284,13.045 13.44,13.045 16.052,10.433 v1(16.052,10.136)
TX: LED3.1 R4.1 R8.2 U1.5 | length 34.1
  Top Layer w0.2: v1(4.193,6.308) 4.193,6.861 R8.2 ; LED3.1 17.33,7.114 17.967,6.477 R4.1 18.245,6.469 19.397,6.469 v1(19.405,6.461) ; U1.5 28.493,11.215 29.546,11.215 29.641,11.12 v1(29.668,11.12)
  GND w0.2: v1(4.193,6.308) 4.562,5.939 4.602,5.939 5.171,5.37 17.737,5.37 18.828,6.461 v1(19.405,6.461) 19.405,7.533 21.018,9.145 28.318,9.145 29.668,10.495 v1(29.668,11.12)
VIN: J2.1 U4.1 | length 29.6
  Top Layer w0.2: v1(2.983,16.263) 3.01,16.263 3.053,16.307 J2.1 ; U4.1 25.043,13.215 v1(25.043,11.87)
  POWER w0.2: v1(2.983,16.263) 2.983,16.785 3.318,17.12 23.051,17.12 23.168,17.003 23.168,15.795 23.468,15.495 24.093,15.495 25.043,14.545 v1(25.043,11.87)
VUSB: C1.1 C8.1 C9.1 D1.0 J3.1 J3.2 J5.A | length 5.6
  Top Layer w0.2: v1(14.791,3.769) 14.818,3.769 14.884,3.835 D1.0 ; v1(26.289,7.391) 26.293,7.395 26.87,7.395 C1.1 ; C9.1 27.178,3.886 v1@27.303,3.761 ; v1(30.418,2.695) 30.42,2.697 30.42,3.503 C8.1 ; v1(33.168,2.67) 33.168,3.523 J5.A ; J3.1 37.67,6.99 38.561,6.99 v1(38.566,6.994) ; J3.2 37.673,9.978 38.735,9.978 v1(38.743,9.97)
  other v1: 27.33,3.736
pads on no net: J3.A1B12 J3.B1A12 U1.3 U1.6 U1.8 U1.9 U1.10 U1.11 U1.12 U1.13 U1.14 U1.19 U1.24 U1.27 U1.28 U4.4

## Polygon pours and split planes (outlines as drawn)
VUSB on Bottom Layer "NONET_L02_P-001" (solid, pour order 4): -0.279,17.45 -0.102,0.178 43.008,-0.048 42.775,17.476 -0.279,17.526
RESET on Top Layer "NONET_L02_P-001" (solid, pour order 3): -0.203,17.247 -0.203,17.323 -0.076,0.152 43.152,0.152 43.05,17.441 0.028,17.441
+5v on POWER "3V3_LAYER" (solid, pour order 1): -0.127,0.178 43.104,0.152 43.104,17.424 -0.152,17.374
GND on GND "GND_LAYER" (solid, pour order 0): -0.127,17.374 -0.127,0.178 43.129,0.178 43.259,0.178 42.903,17.247 -0.127,17.399

## Silkscreen, mask and mechanical layers (free items; w line width, h text height)
Bottom Overlay:
  drawing of 18 lines, arcs and shapes, not listed
  text "Arduino Nano" at 18.495,14.558 h1 r90